# EAGLE board sdmapper (EAGLE 6.3)
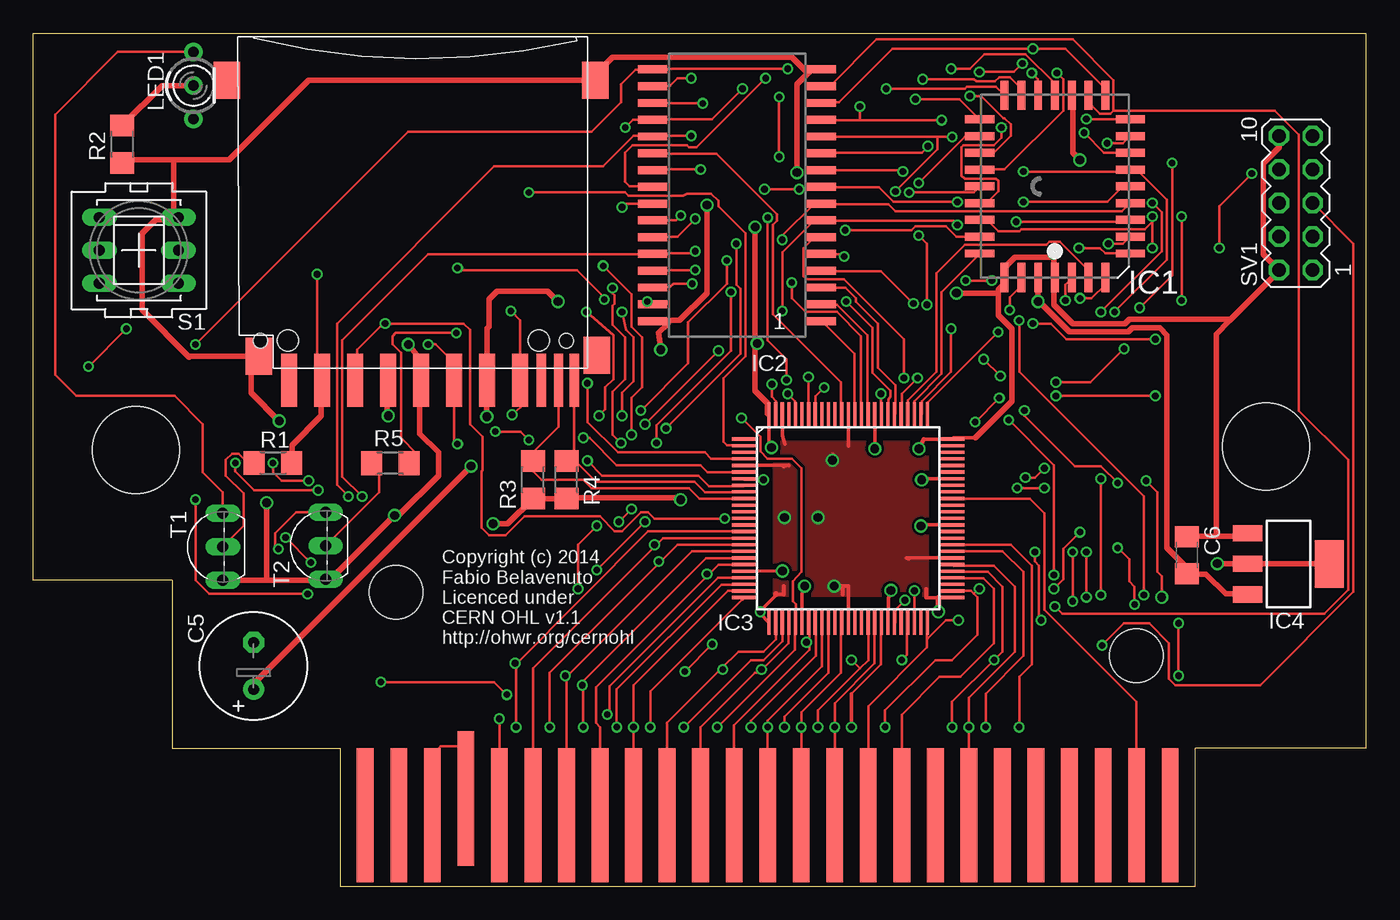
[diagram p0: board, top side]
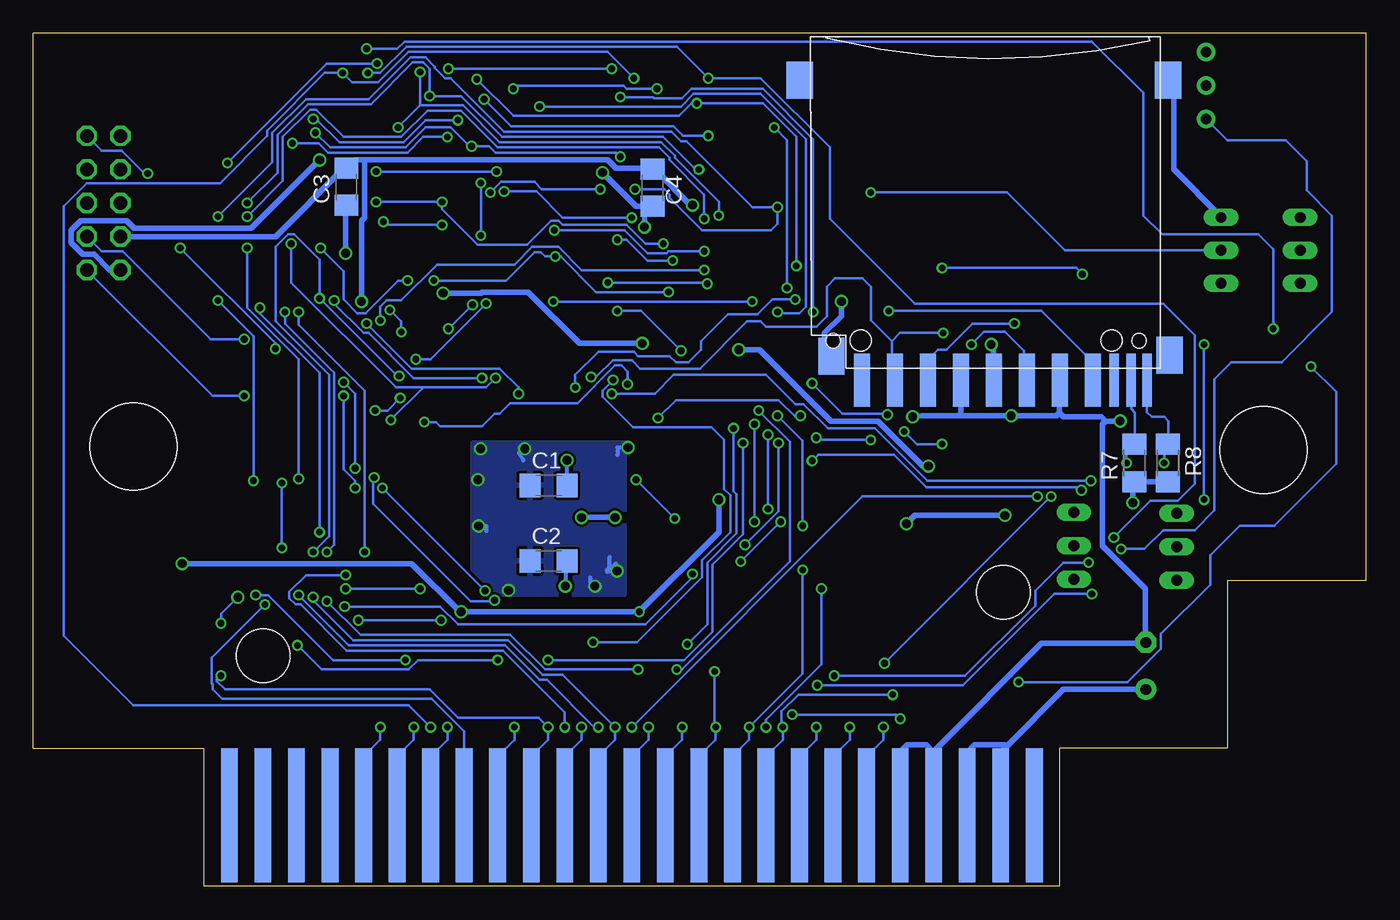
[diagram p1: board, bottom side, seen from below]

Size 101 x 64.62 mm. Coordinates in mm from the lower left corner, seen from the top.
Copper layers (1*16): Top 0.035mm / dielectric 1.5mm / Bottom 0.035mm
Design rules "ITEADstudio_DRC": minimum track width 6mil, minimum drill 12mil, track to track 6mil, track to pad 6mil, pad to pad 6mil, via to via 6mil, smd to smd 0mil, copper to edge 10mil, drill to drill 10mil, minimum pad ring 10mil, minimum via ring 6mil, stop-mask expansion 2mil, vias tented up to drill 100mil, thermal gap 10mil
Net classes: 0 default: width 0.203 mm, drill 0.508 mm, clearance 0.152 mm; 1 power: width 0.406 mm, drill 0.66 mm, clearance 0.203 mm

## Footprints (pad centres in the part's own frame; a part is rotated, then mirrored left to right if it is on the bottom)
C1206 = smd 1.6 x 1.8: 1 -1.4,0; 2 1.4,0
E3,5-8 = drill 0.813 pad 1.6: + -1.778,0 | drill 0.813 pad 1.6 octagon: - 1.778,0
PLCC32R = smd 0.6 x 2.2: 1 0,6.9; 2 -1.27,6.9; 3 -2.54,6.9; 4 -3.81,6.9; 14 -3.81,-6.9; 15 -2.54,-6.9; 16 -1.27,-6.9; 17 0,-6.9; 18 1.27,-6.9; 19 2.54,-6.9; 20 3.81,-6.9; 30 3.81,6.9; 31 2.54,6.9; 32 1.27,6.9 | smd 2.2 x 0.6: 5 -5.7,5.08; 6 -5.7,3.81; 7 -5.7,2.54; 8 -5.7,1.27; 9 -5.7,0; 10 -5.7,-1.27; 11 -5.7,-2.54; 12 -5.7,-3.81; 13 -5.7,-5.08; 21 5.7,-5.08; 22 5.7,-3.81; 23 5.7,-2.54; 24 5.7,-1.27; 25 5.7,0; 26 5.7,1.27; 27 5.7,2.54; 28 5.7,3.81; 29 5.7,5.08
SOP32 = smd 0.6 x 2.2: 1 -9.525,-5.765; 2 -8.255,-5.765; 3 -6.985,-5.765; 4 -5.715,-5.765; 5 -4.445,-5.765; 6 -3.175,-5.765; 7 -1.905,-5.765; 8 -0.635,-5.765; 9 0.635,-5.765; 10 1.905,-5.765; 11 3.175,-5.765; 12 4.445,-5.765; 13 5.715,-5.765; 14 6.985,-5.765; 15 8.255,-5.765; 16 9.525,-5.765; 17 9.525,7.035; 18 8.255,7.035; 19 6.985,7.035; 20 5.715,7.035; 21 4.445,7.035; 22 3.175,7.035; 23 1.905,7.035; 24 0.635,7.035; 25 -0.635,7.035; 26 -1.905,7.035; 27 -3.175,7.035; 28 -4.445,7.035; 29 -5.715,7.035; 30 -6.985,7.035; 31 -8.255,7.035; 32 -9.525,7.035
XC-TQ100 = smd 1.8 x 0.241: 1 -7.9,6; 2 -7.9,5.5; 3 -7.9,5; 4 -7.9,4.5; 5 -7.9,4; 6 -7.9,3.5; 7 -7.9,3; 8 -7.9,2.5; 9 -7.9,2; 10 -7.9,1.5; 11 -7.9,1; 12 -7.9,0.5; 13 -7.9,0; 14 -7.9,-0.5; 15 -7.9,-1; 16 -7.9,-1.5; 17 -7.9,-2; 18 -7.9,-2.5; 19 -7.9,-3; 20 -7.9,-3.5; 21 -7.9,-4; 22 -7.9,-4.5; 23 -7.9,-5; 24 -7.9,-5.5; 25 -7.9,-6; 51 7.9,-6; 52 7.9,-5.5; 53 7.9,-5; 54 7.9,-4.5; 55 7.9,-4; 56 7.9,-3.5; 57 7.9,-3; 58 7.9,-2.5; 59 7.9,-2; 60 7.9,-1.5; 61 7.9,-1; 62 7.9,-0.5; 63 7.9,0; 64 7.9,0.5; 65 7.9,1; 66 7.9,1.5; 67 7.9,2; 68 7.9,2.5; 69 7.9,3; 70 7.9,3.5; 71 7.9,4; 72 7.9,4.5; 73 7.9,5; 74 7.9,5.5; 75 7.9,6 | smd 0.241 x 1.8: 26 -6,-7.9; 27 -5.5,-7.9; 28 -5,-7.9; 29 -4.5,-7.9; 30 -4,-7.9; 31 -3.5,-7.9; 32 -3,-7.9; 33 -2.5,-7.9; 34 -2,-7.9; 35 -1.5,-7.9; 36 -1,-7.9; 37 -0.5,-7.9; 38 0,-7.9; 39 0.5,-7.9; 40 1,-7.9; 41 1.5,-7.9; 42 2,-7.9; 43 2.5,-7.9; 44 3,-7.9; 45 3.5,-7.9; 46 4,-7.9; 47 4.5,-7.9; 48 5,-7.9; 49 5.5,-7.9; 50 6,-7.9; 76 6,7.9; 77 5.5,7.9; 78 5,7.9; 79 4.5,7.9; 80 4,7.9; 81 3.5,7.9; 82 3,7.9; 83 2.5,7.9; 84 2,7.9; 85 1.5,7.9; 86 1,7.9; 87 0.5,7.9; 88 0,7.9; 89 -0.5,7.9; 90 -1,7.9; 91 -1.5,7.9; 92 -2,7.9; 93 -2.5,7.9; 94 -3,7.9; 95 -3.5,7.9; 96 -4,7.9; 97 -4.5,7.9; 98 -5,7.9; 99 -5.5,7.9; 100 -6,7.9
SOT223 = smd 1.219 x 2.235: 1 -2.311,-3.099; 2 0,-3.099; 3 2.311,-3.099 | smd 3.6 x 2.2: 4 0,3.099
MSXCART = smd 1.27 x 10.16 bottom: +5V1 26.67,6.35; +5V2 29.21,6.35; /CS1 85.09,6.35; /CS12 82.55,6.35; /IORQ 72.39,6.35; /M1 74.93,6.35; /RESET 67.31,6.35; /RESV2 80.01,6.35; /WAIT 77.47,6.35; /WR 69.85,6.35; A1 52.07,6.35; A3 49.53,6.35; A5 46.99,6.35; A7 59.69,6.35; A9 64.77,6.35; A11 62.23,6.35; A12 57.15,6.35; A14 54.61,6.35; D1 44.45,6.35; D3 41.91,6.35; D5 39.37,6.35; D7 36.83,6.35; GND1 31.75,6.35; GND2 34.29,6.35; SOUNDIN 24.13,6.35 | smd 1.27 x 10.16: +12V 26.67,6.35; -12V 24.13,6.35; /BUSDIR 74.93,6.35; /CS2 85.09,6.35; /INT 77.47,6.35; /MREQ 72.39,6.35; /RD 69.85,6.35; /RESV1 67.31,6.35; /RFSH 80.01,6.35; /SLTSL 82.55,6.35; A0 52.07,6.35; A2 49.53,6.35; A4 46.99,6.35; A6 59.69,6.35; A8 57.15,6.35; A10 62.23,6.35; A13 54.61,6.35; A15 64.77,6.35; CLOCK 34.29,6.35; D0 44.45,6.35; D2 41.91,6.35; D4 39.37,6.35; D6 36.83,6.35; SW1 31.75,7.62; SW2 29.21,6.35 | hole 4.064: 26.47,23.215; 82.539,18.415 | hole 6.604: 92.358,34.277; 6.751,34.007
DUOLED-C-3MM = drill 0.8 pad 1.4: 1 -2.54,0; 2 0,0; 3 2.54,0
R1206 = smd 1.6 x 1.803: 1 -1.422,0; 2 1.422,0
PVA2R = drill 0.813 long: 1 -2.997,2.489; 2 -2.997,0; 3 -2.997,-2.489; 4 2.997,2.489; 5 2.997,0; 6 2.997,-2.489
MA05-2 = drill 1.016 octagon: 1 -5.08,-1.27; 2 -5.08,1.27; 3 -2.54,-1.27; 4 -2.54,1.27; 5 0,-1.27; 6 0,1.27; 7 2.54,-1.27; 8 2.54,1.27; 9 5.08,-1.27; 10 5.08,1.27
TO92-EBC = drill 0.813 long: B 0,-1.27; C 2.54,-1.27; E -2.54,-1.27
06132 = smd 1.2 x 4: 1 6.9,0.9; 2 4.4,0.9; 3 1.9,0.9; 4 -0.6,0.9; 5 -3.1,0.9; 6 -5.6,0.9; 7 -8.1,0.9; 9 9.4,0.9 | smd 0.7 x 4: 8 -9.7,0.9; CD -11,0.9; WP -12.2,0.9 | smd 2 x 2.8: GP -13.8,-21.8; GP2 14.1,-21.8; GP3 11.7,-0.9; GP4 -13.9,-1 | hole 1.1: -11.6,-2.1 | hole 1.6: 9.5,-2.1

## Placement (x,y rotation side)
C1  100n  [C1206]  61.95,30.37 0 bottom
C2  100n  [C1206]  61.95,24.65 0 bottom
C3  100n  [C1206]  77.26,52.97 90 bottom
C4  100n  [C1206]  54.07,52.9 90 bottom
C5  220u  [E3,5-8]  16.71,16.7 90 top
C6  100n  [C1206]  87.39,25.08 270 top
IC1  AM29F010J  [PLCC32R]  77.4,53.01 180 top
IC2  HM628512ASOP32  [SOP32]  53.97,52.34 90 top
IC3  XC95144XL_TQ100  [XC-TQ100]  61.75,27.88 0 top
IC4  LM1117-3V3  [SOT223]  95.09,24.42 270 top
JP1  MSXCART1  [MSXCART]  1.03,-0.95 0 top
LED1  [DUOLED-C-3MM]  12.15,60.64 270 top
R1  4K7  [R1206]  18.18,32.07 180 top
R2  330  [R1206]  6.75,56.2 90 top
R3  4K7  [R1206]  37.87,30.8 270 top
R4  4K7  [R1206]  40.41,30.8 270 top
R5  4K7  [R1206]  27.06,32.04 0 top
R7  4K7  [R1206]  17.58,32.06 270 bottom
R8  4K7  [R1206]  15.04,32.06 270 bottom
S1  PVA2R  [PVA2R]  8.02,48.16 180 top
SV1  JTAG  [MA05-2]  95.65,51.75 90 top
T1  BC558  [TO92-EBC]  13.1,25.72 90 top
T2  BC558  [TO92-EBC]  20.89,25.8 90 top
U$1  SDMMC06132  [06132]  28.8,39.23 180 top
U$2  SDMMC06132  [06132]  28.82,39.23 180 bottom

## Library data of the parts
C1-C6 R1-R5 R7 R8 = rcl
IC1 = am29-memory
IC2 = hitachi_sram_hm628512a-series_rev1
IC3 = XC
IC4 = SparkFun-PowerIC
JP1 = msx-con
LED1 = led_duoled
S1 = switch-misc
SV1 = con-lstb; OC_FARNELL: unknown; OC_NEWARK: unknown
T1 T2 = transistor
U$1 U$2 = adafruit

## Nets
+3V3 [power]: C1.2 C2.2 IC3.5 IC3.26 IC3.38 IC3.51 IC3.57 IC3.88 IC3.98 IC4.2 IC4.4 R3.2 R4.2 R7.2 R8.2 T1.E T2.E U$1.4 U$2.4
CLOCK: IC3.22 JP1.CLOCK
CPU_A0: IC1.12 IC2.12 IC3.32 JP1.A0
CPU_A1: IC1.11 IC2.11 IC3.30 JP1.A1
CPU_A2: IC1.10 IC2.10 IC3.29 JP1.A2
CPU_A3: IC1.9 IC2.9 IC3.28 JP1.A3
CPU_A4: IC1.8 IC2.8 IC3.27 JP1.A4
CPU_A5: IC1.7 IC2.7 IC3.25 JP1.A5
CPU_A6: IC1.6 IC2.6 IC3.42 JP1.A6
CPU_A7: IC1.5 IC2.5 IC3.41 JP1.A7
CPU_A8: IC1.27 IC2.27 IC3.37 JP1.A8
CPU_A9: IC1.26 IC2.26 IC3.52 JP1.A9
CPU_A10: IC1.23 IC2.23 IC3.50 JP1.A10
CPU_A11: IC1.25 IC2.25 IC3.43 JP1.A11
CPU_A12: IC1.4 IC2.4 IC3.35 JP1.A12
CPU_A13: IC1.28 IC2.28 IC3.34 JP1.A13
CPU_A14: IC3.33 JP1.A14
CPU_A15: IC3.54 JP1.A15
CPU_D0: IC1.13 IC2.13 IC3.24 JP1.D0
CPU_D1: IC1.14 IC2.14 IC3.23 JP1.D1
CPU_D2: IC1.15 IC2.15 IC3.20 JP1.D2
CPU_D3: IC1.17 IC2.17 IC3.19 JP1.D3
CPU_D4: IC1.18 IC2.18 IC3.18 JP1.D4
CPU_D5: IC1.19 IC2.19 IC3.17 JP1.D5
CPU_D6: IC1.20 IC2.20 IC3.16 JP1.D6
CPU_D7: IC1.21 IC2.21 IC3.15 JP1.D7
CPU_IORQ: IC3.58 JP1./IORQ
CPU_M1: IC3.59 JP1./M1
CPU_MREQ: JP1./MREQ
CPU_RD: IC1.24 IC2.24 IC3.56 JP1./RD
CPU_WR: IC2.29 IC3.55 JP1./WR
DIS_MAPPER: IC3.2 S1.2
GND [power]: C1.1 C2.1 C3.1 C4.1 C5.- C6.1 IC1.1 IC1.16 IC1.30 IC2.16 IC3.21 IC3.31 IC3.44 IC3.62 IC3.69 IC3.75 IC3.84 IC3.100 IC4.1 JP1.GND1 JP1.GND2 R2.1 S1.3 SV1.2 SV1.10 U$1.3 U$1.6 U$1.GP U$1.GP3 U$2.3 U$2.6 U$2.GP U$2.GP3
N$1: JP1.SW1 JP1.SW2
N$2: LED1.1 T1.C
N$3: LED1.2 R2.2
N$4: R1.2 T1.B
N$5: R5.1 T2.B
N$8: LED1.3 T2.C
RAM_A14: IC2.3 IC3.81
RAM_A15: IC2.31 IC3.82
RAM_A16: IC2.2 IC3.85
RAM_A17: IC2.30 IC3.86
RAM_A18: IC2.1 IC3.87
RAM_CS: IC2.22 IC3.89
RESET: IC3.99 JP1./RESET
ROM_A14: IC1.29 IC3.78
ROM_A15: IC1.3 IC3.79
ROM_A16: IC1.2 IC3.80
ROM_CS: IC1.22 IC3.77
ROM_WE: IC1.31 IC3.76
SD_CD0: IC3.10 R3.1 U$1.CD
SD_CD1: IC3.96 R7.1 U$2.CD
SD_CS0: IC3.93 R1.1 U$1.1
SD_CS1: IC3.94 R5.2 U$2.1
SD_MISO: IC3.4 U$1.7 U$2.7
SD_MOSI: IC3.7 U$1.2 U$2.2
SD_SCLK: IC3.6 U$1.5 U$2.5
SD_WP0: IC3.9 R4.1 U$1.WP
SD_WP1: IC3.8 R8.1 U$2.WP
SLTSL: IC3.66 JP1./SLTSL
TCK: IC3.48 SV1.1
TDI: IC3.45 SV1.9
TDO: IC3.83 SV1.3
TMS: IC3.47 SV1.5
VCC [power]: C3.2 C4.2 C5.+ C6.2 IC1.32 IC2.32 IC4.3 JP1.+5V1 JP1.+5V2 SV1.4

## Tracks (layer width: path | path; a pad name or v marks a point on that pad's centre or on a via)
+3V3  (via drill 0.51, 0.66)
  Top 0.254: IC3.88 61.75,33.34 | IC3.98 56.75,34.13 56.95,33.49 | IC3.5 57.25,31.88 | IC3.57 66.17,24.88 | IC3.51 68.58,21.88 67.67,21.88 | IC3.38 61.75,22.75 | 56.87,22.11 56.28,22.11 56.28,22.07 55.09,20.88 v55.09,20.8 55.09,20.64 IC3.26
  Top 0.305: v60.55,32.27 60.55,32.7 | 57.25,31.88 56.85,31.81 | 66.17,24.88 66.37,24.83 | 67.67,21.88 67.67,22.54 | 61.32,22.11 61.32,22.75 v60.68,22.75 61.75,22.75 | 56.87,22.11 56.87,22.75
  Top 0.406: IC4.4 98.19,24.45 92,24.45 IC4.2 91.84,24.45 v89.7,24.45 | v68.58,20.8 68.58,21.88 | 17.7,23.18 22.07,23.18 22.15,23.26 T2.E 22.31,23.34 22.78,23.34 22.78,23.49 v27.39,28.1 27.71,28.1 30.72,31.11 30.72,32.86 29.29,34.29 29.29,38.12 U$1.4 | 17.7,23.18 T1.E | 17.7,23.18 v17.7,29.05 | v28.42,41.04 29.05,40.24 29.37,38.66 U$1.4 | R3.2 R4.2 40.56,29.45 48.98,29.45 v49.06,29.29 | 29.53,37.47 29.53,38.18 U$1.4 | 37.71,29.45 R3.2 | 56.28,22.15 56.28,22.11 | v34.85,27.46 35.95,27.46 R3.2
  Bottom 0.305: C1.2 v60.55,32.27 | C2.2 60.68,24.65 v60.68,22.75
  Bottom 0.406: v89.7,24.45 72.31,24.45 68.74,20.88 v68.58,20.8 v55.09,20.8 49.06,26.83 v49.06,29.29 | R8.2 15.08,30.64 17.55,30.64 R7.2 17.7,30.48 v17.7,29.05 | v28.42,41.04 28.26,40.88 28.26,38.34 U$2.4 | v56.91,27.94 v59.45,27.94 | v27.39,28.1 34.21,28.1 v34.85,27.46
  pour Top (rank 2): 56.24,33.54 67.67,33.54 67.67,22.11 56.24,22.11
CLOCK  (via drill 0.51)
  Top 0.203: IC3.22 51.87,23.38 43.66,15.16 43.66,13.1 v43.5,13.02 | v35.33,12.7 JP1.CLOCK
  Bottom 0.203: v43.5,13.02 35.64,13.02 v35.33,12.7
CPU_A0  (via drill 0.51)
  Top 0.203: JP1.A0 53.11,12.22 58.82,17.94 58.82,18.49 | 58.82,18.49 58.82,19.91 IC3.32 | v69.61,56.75 68.5,56.75 | 68.5,56.75 59.77,56.75 IC2.12 | v81.36,56.28 82.55,56.28 83.03,56.75 IC1.12 | 68.5,56.75 68.5,55.8 v65.33,52.63 | v55.65,50.64 55.65,41.35 57.07,39.93 v57.07,38.34 | 58.82,18.49 v58.58,18.49
  Bottom 0.203: v69.61,56.75 71.44,56.75 72.63,55.56 78.66,55.56 79.38,56.28 v81.36,56.28 | v65.33,52.63 62.87,52.63 60.88,50.64 v55.65,50.64 | v57.07,38.34 57.87,37.54 57.87,37.07 55.57,34.77 49.61,34.77 48.66,33.81 48.66,30.08 48.18,29.61 48.18,26.83 50.33,24.69 50.33,23.42 55.25,18.49 v58.58,18.49
CPU_A1  (via drill 0.51)
  Top 0.203: v51.84,12.07 57.71,17.94 57.71,19.93 IC3.30 57.71,20.08 57.79,20.32 57.79,21.35 57.55,21.59 57.55,23.1 58.19,23.81 58.19,31.67 57.47,32.39 55.65,32.39 55.09,32.94 55.09,34.05 v53.66,35.48 | v67.79,56.04 67.31,55.56 59.77,55.56 IC2.11 | v79.62,57.07 81.12,55.56 83.03,55.56 IC1.11 | v56.52,59.77 v56.52,55.25 | v41.91,43.5 43.98,41.75 43.98,38.42 43.34,37.78 43.34,36.12 v42.87,35.64
  Bottom 0.203: 53.11,9.84 51.84,11.11 v51.84,12.07 | v79.62,57.07 78.5,55.96 72.79,55.96 71.28,57.47 69.38,57.47 67.95,56.04 v67.79,56.04 66.44,56.04 65.96,55.56 56.84,55.56 v56.52,55.25 | v41.91,43.5 41.91,56.59 45.72,60.4 51.12,60.4 51.84,59.69 53.98,59.69 54.06,59.77 v56.52,59.77 | v53.66,35.48 52.31,36.83 44.53,36.83 43.26,35.56 42.95,35.56 v42.87,35.64
  Bottom 0.254: JP1.A1 53.11,9.84
CPU_A2  (via drill 0.51)
  Top 0.203: JP1.A2 50.56,12.07 54.69,16.19 55.01,16.19 55.21,16.39 | 55.21,16.39 57.23,18.42 57.23,19.96 IC3.29 | v65.88,54.13 65.81,54.21 59.77,54.21 IC2.10 | v75.01,54.13 82.95,54.13 83.03,54.21 IC1.10 83.19,54.29 83.58,54.29 85.89,51.99 85.89,47.47 v81.92,43.5 | v78.74,21.59 v78.74,25.32 | v55.17,16.43 55.21,16.39
  Bottom 0.203: v75.01,54.13 v65.88,54.13 | v81.92,43.5 81.92,42.62 78.19,38.89 78.19,25.88 v78.74,25.32 | v78.74,21.59 76.2,19.05 64.85,19.05 62.23,16.43 v55.17,16.43
CPU_A3  (via drill 0.51)
  Top 0.203: v49.3,12.07 54.38,17.15 55.33,17.15 56.76,18.57 IC3.28 | v70.01,51.83 65.17,51.83 64.06,52.94 59.77,52.94 IC2.9 | v75.01,51.83 81.36,51.83 82.47,52.94 83.03,52.94 IC1.9 | v53.26,48.66 53.26,45.56 53.58,45.24 53.58,40.32 v47.95,34.69 | v49.37,16.27 v51.44,18.34
  Bottom 0.203: 50.56,9.84 49.3,11.11 v49.3,12.07 49.37,12.14 v49.37,16.27 | v75.01,51.83 v70.01,51.83 70.01,51.28 67.31,48.58 63.58,48.58 61.76,50.4 61.2,50.4 60.88,50.09 56.04,50.09 54.61,48.66 v53.26,48.66 | v47.95,34.69 47.95,29.92 47.71,29.69 47.71,26.75 49.93,24.53 49.93,19.84 v51.44,18.34
  Bottom 0.254: JP1.A3 50.56,9.84
CPU_A4  (via drill 0.51)
  Top 0.203: JP1.A4 48.02,12.38 52.15,16.51 | 52.15,16.51 53.42,17.78 55.33,17.78 56.28,18.73 56.28,19.95 IC3.27 | IC1.8 83.03,51.67 82.47,51.12 65.33,51.12 64.77,51.67 59.77,51.67 IC2.8 59.69,51.67 59.14,51.67 56.76,49.29 v56.76,48.97 | v52.55,47.39 52.55,45.64 49.61,42.7 49.61,39.61 v46.04,36.04 | v52.23,16.43 52.15,16.51
  Bottom 0.203: v56.76,48.97 56.04,48.97 54.45,47.39 v52.55,47.39 | v46.04,36.04 43.66,33.65 43.66,24.61 51.84,16.43 v52.23,16.43
CPU_A5  (via drill 0.51)
  Top 0.203: v46.76,12.07 46.76,14.76 53.74,21.75 | 53.82,21.91 IC3.25 | v70.01,50.09 69.69,50.4 59.77,50.4 IC2.7 59.69,50.4 59.14,50.4 56.76,48.02 v56.76,43.58 | v74.46,50.32 82.95,50.32 83.03,50.4 IC1.7 | v46.36,35 v51.91,40.56 | v42.71,23.97 v46.36,27.62
  Top 0.254: 53.74,21.75 53.82,21.91
  Bottom 0.203: 48.02,9.84 46.76,11.11 v46.76,12.07 42.71,16.11 v42.71,23.97 | v70.01,50.09 74.22,50.09 v74.46,50.32 | v56.76,43.58 54.93,43.58 v51.91,40.56 | v46.36,27.62 v46.36,35
  Bottom 0.254: JP1.A5 48.02,9.84
CPU_A6  (via drill 0.51)
  Top 0.203: JP1.A6 v60.73,12.07 60.73,13.89 63.74,16.91 63.74,19.97 IC3.42 | v65.96,38.5 65.96,41.43 61.44,45.96 58.58,45.96 58.34,46.2 58.34,48.34 59.14,49.13 59.69,49.13 IC2.6 | v81.44,48.66 82.55,48.66 83.03,49.13 IC1.6 | v77.31,23.57 77.31,31.91 v73.9,35.32
  Bottom 0.203: v65.96,38.5 66.68,37.78 71.52,37.78 | 71.52,37.78 73.5,37.78 81.44,45.72 v81.44,48.66 | v60.73,12.07 60.73,13.18 65.41,17.86 77.23,17.86 80.73,21.35 81.12,21.35 81.6,21.83 81.6,22.3 80.33,23.57 v77.31,23.57 | v73.9,35.32 71.52,37.7 71.52,37.78
CPU_A7  (via drill 0.51)
  Top 0.203: v59.45,12.07 59.45,13.34 62.63,16.51 | 62.63,16.51 63.27,17.15 63.27,19.96 IC3.41 | v61.44,47.7 61.28,47.86 59.77,47.86 IC2.5 | v72.63,45.88 v70.65,45.88 | v79.22,48.34 80.81,48.34 81.2,47.94 83.03,47.94 IC1.5 | v52.87,45.01 52.87,40.56 47.23,34.93 v47.23,33.58 | 62.63,16.51 v61.99,17.15
  Bottom 0.203: 60.73,9.84 59.45,11.11 v59.45,12.07 | v70.65,45.88 65.17,45.88 63.03,48.02 62.55,48.02 62.23,47.7 v61.44,47.7 61.04,47.7 58.34,45.01 v52.87,45.01 | v72.63,45.88 73.35,45.88 75.81,43.42 76.44,43.42 77.47,44.45 77.47,46.59 v79.22,48.34 | v47.23,33.58 47.23,26.67 49.53,24.37 49.53,19.29 51.68,17.15 v61.99,17.15
  Bottom 0.254: JP1.A7 60.73,9.84
CPU_A8  (via drill 0.51)
  Top 0.203: JP1.A8 v58.19,12.07 58.19,13.18 61.2,16.19 61.2,19.93 IC3.37 | v50.17,50.56 48.82,49.21 48.26,49.21 IC2.27 | 84.78,50.32 v84.78,50.72 | 84.78,50.32 84.22,49.77 74.85,49.77 74.7,49.61 73.11,49.61 72.31,50.4 71.76,50.4 IC1.27 | v80.89,30.88 v80.89,22.07 | 84.78,50.32 v84.78,48.34
  Bottom 0.203: v50.17,50.56 50.17,52.39 52.79,55.01 52.79,55.17 53.58,55.96 65.81,55.96 68.58,58.74 71.12,58.74 73.11,56.75 77.47,56.75 79.54,58.82 80.01,58.82 82.08,56.75 82.08,53.42 v84.78,50.72 | v58.19,12.07 58.5,12.07 62.07,15.64 62.63,15.64 65.25,18.26 77.08,18.26 v80.89,22.07 | v80.89,30.88 80.89,39.93 84.78,43.82 v84.78,48.34
CPU_A9  (via drill 0.51)
  Top 0.203: v64.53,12.07 64.53,13.34 68.34,17.15 69.61,17.15 71.52,19.05 71.52,21.91 71.28,22.15 | 71.28,22.15 71.04,22.38 IC3.52 | v73.35,57.47 73.35,56.67 72.79,56.12 70.49,56.12 70.33,55.96 70.33,53.82 70.57,53.58 72.95,53.58 73.11,53.42 73.11,52.63 72.23,51.75 71.76,51.75 IC1.26 | v71.68,61.67 74.3,61.67 v74.93,62.31 | v86.28,54.77 86.28,46.28 v83.82,43.82 | v79.3,26.83 78.03,25.56 78.03,23.26 v77.31,22.54 | 71.28,22.15 v71.68,22.54 | IC2.26 48.69,50.43 v49.06,50.8
  Bottom 0.203: 65.81,9.84 64.53,11.11 v64.53,12.07 | v49.06,50.8 49.06,51.83 52.39,55.17 52.39,55.32 53.42,56.36 65.65,56.36 68.42,59.13 71.68,59.13 | v73.35,57.47 71.68,59.13 | v71.68,61.67 71.68,59.13 | v74.93,62.31 78.74,62.31 v86.28,54.77 | v83.82,43.82 83.82,43.42 79.3,38.89 v79.3,26.83 | v71.68,22.54 v77.31,22.54
  Bottom 0.254: JP1.A9 65.81,9.84
CPU_A10  (via drill 0.51)
  Top 0.203: JP1.A10 63.27,13.65 67.71,18.1 67.71,18.81 | 67.71,18.81 67.71,19.93 IC3.50 | v50.56,54.29 48.26,54.29 IC2.23 | v70.96,59.85 71.84,59.85 73.5,58.18 73.58,58.18 74.06,57.71 74.06,56.83 72.79,55.56 71.76,55.56 IC1.23 | v84.78,51.75 85.49,51.04 85.49,48.1 v80.89,43.5 | v75.89,25.32 75.89,24.61 76.2,24.29 76.2,20.32 v76.36,20.16 | v70.09,20.16 69.14,20.16 67.79,18.81 67.71,18.81
  Bottom 0.203: v50.56,54.29 50.8,54.29 53.26,56.75 65.49,56.75 68.58,59.85 v70.96,59.85 70.96,61.91 71.44,62.39 72.23,62.39 75.41,59.21 80.17,59.21 82.47,56.91 82.47,54.05 v84.78,51.75 | v80.89,43.5 80.89,42.54 75.89,37.54 v75.89,25.32 | v70.09,20.16 v76.36,20.16
CPU_A11  (via drill 0.51, 0.66)
  Top 0.203: v58.03,52.78 v55.41,52.78 | v66.36,52.55 71.28,52.55 71.68,52.94 IC1.25 | v87,44.37 v87,50.72 | 61.99,14.6 64.22,16.83 64.22,19.94 IC3.43 | v86.76,19.92 v86.76,15.95 | v85.49,21.91 85.49,23.49 85.17,23.81 85.17,29.84 v84.3,30.72 | IC2.25 44.88,51.7 v44.61,51.43
  Top 0.254: v61.99,12.07 61.99,14.6
  Bottom 0.203: 63.27,9.84 61.99,11.11 v61.99,12.07 62.71,12.78 68.82,12.78 70.96,14.92 86.44,14.92 87.08,15.56 87.08,15.64 v86.76,15.95 | v55.41,52.78 53.18,52.78 52.79,52.39 52.79,52.15 50.33,49.69 45.09,49.69 44.61,50.16 v44.61,51.43 46.52,51.43 51.52,56.44 51.91,56.44 52.63,57.15 65.33,57.15 69.38,61.2 69.77,61.2 70.57,61.99 70.57,62.07 71.28,62.79 72.39,62.79 75.57,59.61 80.33,59.61 82.87,57.07 82.87,54.85 v87,50.72 | v58.03,52.78 62.47,52.78 63.03,53.34 65.57,53.34 v66.36,52.55 | v87,44.37 84.3,41.67 v84.3,30.72 | v86.76,19.92 86.76,20.64 v85.49,21.91
  Bottom 0.254: JP1.A11 63.27,9.84
CPU_A12  (via drill 0.51)
  Top 0.203: v56.91,12.07 56.91,12.86 60.25,16.19 IC3.35 | v66.68,44.13 64.22,46.59 59.77,46.59 IC2.4 | v73.27,38.66 v72,39.93 | v79.3,44.53 80.17,44.53 81.2,45.56 81.2,46.04 IC1.4 | v79.78,21.91 v79.78,25.32
  Top 0.254: IC3.35
  Bottom 0.203: 58.19,9.84 56.91,11.11 v56.91,12.07 60.88,16.03 62.39,16.03 65.01,18.65 76.76,18.65 79.78,21.67 v79.78,21.91 | v66.68,44.13 70.89,39.93 v72,39.93 | v73.27,38.66 73.42,38.66 v79.3,44.53 79.3,47.47 81.2,49.37 81.68,49.37 82.63,48.42 82.63,42.78 78.58,38.73 78.58,26.51 v79.78,25.32
  Bottom 0.254: JP1.A12 58.19,9.84
CPU_A13  (via drill 0.51)
  Top 0.203: JP1.A13 v55.65,12.07 55.65,12.54 59.77,16.67 59.77,19.95 IC3.34 | v50.17,48.1 50.01,47.94 48.26,47.94 IC2.28 48.1,47.86 29.93,47.86 23.42,41.35 23.42,31.04 v24.93,29.53 | v61.52,49.69 66.52,49.69 66.84,50.01 69.14,50.01 69.93,49.21 71.68,49.21 IC1.28
  Bottom 0.203: v50.17,48.1 52.87,48.1 53.03,47.94 54.45,47.94 56.2,49.69 v61.52,49.69 | v24.93,29.53 38.18,29.53 v55.65,12.07
CPU_A14  (via drill 0.51)
  Top 0.203: v54.38,12.07 54.38,12.54 59.3,17.46 59.3,19.93 IC3.33
  Bottom 0.203: 55.65,9.84 54.38,11.11 v54.38,12.07
  Bottom 0.254: JP1.A14 55.65,9.84
CPU_A15
  Top 0.203: JP1.A15 65.81,13.02 68.66,15.87 70.25,15.87 72.79,18.42 72.79,22.54 72,23.34 69.69,23.34 IC3.54
CPU_D0  (via drill 0.51)
  Top 0.203: JP1.D0 v45.48,12.07 45.48,15.24 52.63,22.38 53.84,22.38 IC3.24 | v68.82,58.02 62.63,58.02 | 62.63,58.02 59.77,58.02 IC2.13 | v79.78,58.1 83.03,58.1 IC1.13 | v62.63,59.05 62.63,58.02 | v44.61,35.64 44.61,37.39 45.48,38.26 45.48,41.59 44.93,42.15 v44.61,43.5 | v42.71,27.31 41.28,25.88 v41.28,22.54
  Bottom 0.203: v68.82,58.02 71.28,58.02 72.95,56.36 77.79,56.36 79.54,58.1 v79.78,58.1 | v62.63,59.05 51.91,59.05 50.96,60.01 45.88,60.01 42.47,56.59 42.47,43.89 42.95,43.42 44.53,43.42 v44.61,43.5 | v44.61,35.64 42.71,33.73 v42.71,27.31 | v41.28,22.54 41.28,16.83 45.48,12.62 v45.48,12.07
CPU_D1  (via drill 0.51)
  Top 0.203: v44.22,12.07 44.22,14.92 52.15,22.86 53.84,22.86 IC3.23 | IC2.14 59.77,59.37 61.04,59.37 65.09,63.42 v75.73,63.42 78.19,63.42 81.2,60.4 81.2,59.93 IC1.14 | v26.36,15.48 34.93,15.48 v35.88,14.53 | v4.21,39.37 v7.07,42.23
  Bottom 0.203: 45.48,9.84 44.22,11.11 v44.22,12.07 44.29,12.14 44.29,13.26 43.02,14.53 v35.88,14.53 | v75.73,63.42 73.42,63.42 72.87,63.98 20.8,63.98 16.91,60.09 16.91,50.8 15.48,49.37 8.18,49.37 7.07,48.26 v7.07,42.23 | v26.36,15.48 18.1,15.48 15.56,18.02 15.56,19.13 11.83,22.86 11.83,25.08 9.61,27.31 6.99,27.31 2.3,31.99 2.3,37.47 v4.21,39.37
  Bottom 0.254: JP1.D1 45.48,9.84
CPU_D2  (via drill 0.51)
  Top 0.203: JP1.D2 42.95,12.07 42.63,12.38 42.63,15.08 51.12,23.57 | 51.12,23.57 51.91,24.37 53.84,24.37 IC3.20 | 81.84,58.74 81.6,58.5 80.81,58.5 80.01,59.29 80.01,59.85 IC1.15 | 81.84,58.74 81.84,61.04 78.74,64.14 63.9,64.14 60.41,60.64 59.77,60.64 IC2.15 | 81.84,58.74 94.06,58.74 95.89,56.91 95.89,36.04 99.62,32.31 99.62,22.46 97.79,20.64 77.95,20.64 v77.39,21.19 | v51.04,23.65 51.12,23.57
  Bottom 0.203: v77.39,21.19 70.17,21.19 68.82,19.84 54.61,19.84 51.04,23.42 v51.04,23.65
CPU_D3  (via drill 0.51)
  Top 0.203: v41.67,12.07 41.67,15.24 | 41.67,15.24 41.67,15.56 50.96,24.84 53.72,24.84 IC3.19 | v57.15,61.91 48.26,61.91 IC2.17 48.1,61.83 45.64,61.83 44.53,60.72 44.53,59.37 42.31,57.15 28.42,57.15 v12.31,41.04 | v69.54,61.91 70.96,61.91 72.08,63.02 75.17,63.02 77.39,60.8 77.39,59.93 IC1.17 | v12.31,29.29 12.31,23.18 13.34,22.15 v20.8,22.15 | v41.6,15.24 41.67,15.24
  Bottom 0.203: 42.95,9.84 41.67,11.11 v41.67,12.07 | v69.54,61.91 v57.15,61.91 | v12.31,29.29 v12.31,41.04 | v20.8,22.15 23.66,22.15 30.56,15.24 v41.6,15.24
  Bottom 0.254: JP1.D3 42.95,9.84
CPU_D4  (via drill 0.51)
  Top 0.203: JP1.D4 40.41,15.87 | 40.41,15.87 49.93,25.4 53.83,25.4 IC3.18 | v75.65,61.6 76.12,61.12 76.12,59.93 IC1.18 | v49.85,61.2 48.82,61.2 48.26,60.64 IC2.18 | v21.04,24.53 v19.13,26.43 | v40.33,15.95 40.41,15.87
  Bottom 0.203: v75.65,61.6 74.7,61.6 72.71,63.58 52.23,63.58 v49.85,61.2 45.88,61.2 40.64,55.96 40.64,50.56 34.21,44.13 15.4,44.13 13.02,41.75 13.02,30.48 14.29,29.21 16.35,29.21 v19.13,26.43 | v21.04,24.53 22.94,24.53 25.09,22.38 25.09,21.27 30.4,15.95 v40.33,15.95
CPU_D5  (via drill 0.51)
  Top 0.203: v39.13,12.07 39.13,16.19 47.47,24.53 | 47.47,24.53 48.82,25.88 IC3.17 | v50.72,59.29 48.26,59.29 IC2.19 | v67.39,61.12 71.28,61.12 71.44,60.96 72.87,60.96 73.19,61.28 73.98,61.28 74.85,60.4 74.85,59.93 IC1.19 | v43.18,46.99 45.33,44.85 45.33,42.39 46.12,41.59 46.12,37.78 45.33,36.99 v45.33,34.21 | v44.37,27.62 v45.33,28.58 | v47.39,24.61 47.47,24.53
  Bottom 0.203: 40.41,9.84 39.13,11.11 v39.13,12.07 | v67.39,61.12 64.61,58.34 52.07,58.34 51.12,59.29 v50.72,59.29 45.72,59.29 43.18,56.75 v43.18,46.99 | v45.33,28.58 v45.33,34.21 | v47.39,24.61 v44.37,27.62
  Bottom 0.254: JP1.D5 40.41,9.84
CPU_D6  (via drill 0.51)
  Top 0.203: JP1.D6 37.87,16.51 47.15,25.8 | 47.15,25.8 47.71,26.35 53.83,26.35 IC3.16 | v53.74,60.4 51.44,58.1 48.26,58.1 IC2.20 45.43,58.05 v44.85,57.47 | v64.61,60.4 70.57,60.4 70.73,60.56 72.95,60.56 73.58,59.93 IC1.20 | v43.9,45.32 43.9,44.93 44.06,44.77 44.06,44.13 43.9,43.97 43.9,42.54 44.85,41.59 44.85,38.42 43.9,37.47 43.9,34.21 v44.53,33.58 | v47.07,25.88 47.15,25.8
  Bottom 0.203: v64.61,60.4 64.53,60.64 56.28,60.64 56.04,60.4 v53.74,60.4 | v44.85,57.47 43.9,56.51 v43.9,45.32 | v44.53,33.58 44.53,28.42 v47.07,25.88
CPU_D7  (via drill 0.51)
  Top 0.203: v36.59,12.07 36.59,16.83 | 36.59,16.83 46.6,26.91 53.8,26.91 IC3.15 | v66.84,59.61 70.17,59.61 71.68,58.1 IC1.21 | v23.89,29.53 23.02,30.4 23.02,42.62 34.93,54.53 43.18,54.53 45.48,56.83 46.88,56.83 IC2.21 46.98,56.83 v49.85,56.83 | v36.52,16.91 36.59,16.83
  Bottom 0.203: 37.87,9.84 36.59,11.11 v36.59,12.07 | v49.85,56.83 51.76,56.83 52.47,57.55 64.77,57.55 v66.84,59.61 | v36.52,16.91 v23.89,29.53
  Bottom 0.254: JP1.D7 37.87,9.84
CPU_IORQ  (via drill 0.51)
  Top 0.203: v72.16,12.07 72.16,14.6 75.01,17.46 75.01,23.81 73.42,25.4 69.67,25.4 IC3.58
  Bottom 0.203: 73.42,9.84 72.16,11.11 v72.16,12.07
  Bottom 0.254: JP1./IORQ 73.42,9.84
CPU_M1  (via drill 0.51)
  Top 0.203: v74.7,12.07 74.7,15.87 75.65,16.83 75.65,24.29 74.06,25.88 IC3.59
  Bottom 0.203: 75.97,9.84 74.7,11.11 v74.7,12.07
  Bottom 0.254: JP1./M1 75.97,9.84
CPU_RD  (via drill 0.51)
  Top 0.203: JP1./RD v70.89,12.07 70.89,14.29 74.38,17.78 74.38,22.7 72.79,24.29 69.74,24.29 IC3.56 | v55.49,61.2 50.25,55.96 49.69,55.96 49.53,56.12 45.41,56.12 44.85,55.56 44.85,53.34 45.17,53.02 46.88,53.02 IC2.24 | v77.55,61.6 78.03,61.12 78.03,58.74 73.58,54.29 71.76,54.29 IC1.24
  Bottom 0.203: v55.49,61.2 57.47,63.18 72.55,63.18 74.85,60.88 76.84,60.88 v77.55,61.6 78.9,61.6 83.27,57.23 83.27,56.83 86.84,53.26 96.92,53.26 98.67,51.51 98.67,18.97 93.43,13.73 72.55,13.73 v70.89,12.07
CPU_WR  (via drill 0.51)
  Top 0.203: v69.61,12.07 69.61,13.97 v72.79,17.15 73.42,17.78 73.42,22.7 72.31,23.81 69.71,23.81 IC3.55 | v50.17,46.67 48.26,46.67 IC2.29 | v74.7,42.86 74.7,38.97 84.14,29.53 v84.14,22.07
  Bottom 0.203: 70.89,9.84 69.61,11.11 v69.61,12.07 | v50.17,46.67 59.45,46.67 61.2,48.42 63.19,48.42 64.53,47.07 70.41,47.07 73.11,44.37 74.22,44.37 74.7,43.89 v74.7,42.86 | v72.79,17.15 78.27,17.15 83.19,22.07 v84.14,22.07
  Bottom 0.254: JP1./WR 70.89,9.84
DIS_MAPPER  (via drill 0.51)
  Top 0.203: v37.55,52.55 44.85,52.55 45.09,52.31 49.22,52.31 49.53,52.47 51.36,52.47 51.91,51.91 51.91,51.51 53.98,49.45 53.98,40.16 52.31,38.5 52.31,33.65 52.55,33.42 53.82,33.42 53.82,33.41 IC3.2
  Bottom 0.203: v37.55,52.55 27.23,52.55 22.86,48.18 11.04,48.18 S1.2
GND  (via drill 0.66)
  Top 0.254: IC3.44 64.77,21.83 v64.97,22.42 | IC3.21 v56.77,23.89 | IC3.31 58.25,22.18 v58.45,22.75 | IC3.84 63.76,34.08 v63.76,33.15 | 67.45,33.88 IC3.75 69.69,33.97 71.36,33.97 | IC3.69 67.21,30.88 | IC3.62 67.26,27.38 | v55.93,33.24 55.73,33.48 55.75,34.23 IC3.100 55.65,35.8
  Top 0.305: 67.45,33.88 v67.09,33.15 | 67.21,30.88 v67.31,30.8 | 67.26,27.38 v67.26,27.29
  Top 0.406: 71.36,33.97 74.14,36.75 74.14,42.23 73.11,43.26 73.11,44.93 | 73.11,44.93 73.11,45.16 73.5,45.56 73.5,45.96 IC1.30 73.66,46.12 73.66,46.91 74.38,47.62 77.16,47.62 v77.31,47.94 77.31,46.2 IC1.1 77.31,45.96 77.31,44.05 78.74,42.62 82.71,42.62 83.03,42.94 90.49,42.94 90.61,42.82 | 89.62,26.51 91.76,26.51 91.92,26.67 IC4.1 | 89.62,26.51 87.39,26.51 C6.1 | v79.3,55.01 78.74,55.56 78.74,59.85 IC1.16 | SV1.10 94.38,55.96 93.19,54.77 93.19,47.86 SV1.2 94.3,46.51 90.61,42.82 | 89.62,26.51 89.62,41.83 90.61,42.82 | v57.87,54.05 57.87,60.72 58.7,61.56 | 58.7,61.56 58.98,61.83 59.69,61.83 IC2.16 | 55.65,35.8 55.65,36.59 54.69,37.54 54.69,41.12 | v54.69,49.93 54.69,41.12 | 58.7,61.56 57.47,62.79 43.9,62.79 42.15,61.04 41.99,61.04 U$1.GP 41.75,61.04 20.88,61.04 14.85,55.01 10.66,55.01 | v34.37,35.56 34.37,36.35 U$1.6 34.4,42.25 34.53,42.39 34.53,44.45 35.17,45.08 38.98,45.08 v39.77,44.29 | U$1.3 26.83,36.35 26.83,35.72 v26.91,35.64 | v18.66,35.24 16.51,37.39 16.51,39.93 U$1.GP3 16.43,40.16 11.99,40.16 11.83,40.08 8.26,43.66 8.26,49.45 9.29,50.48 10.85,50.48 S1.3 10.66,51.01 10.66,55.01 | 10.66,55.01 6.98,55.01 R2.1 | v69.93,44.93 73.11,44.93 | v54.85,41.12 54.69,41.12
  Bottom 0.305: 56.85,24.46 57.51,23.83 57.51,24.02 | v58.45,22.75 58.78,22.75 58.78,23.38 | v64.97,22.42 65.13,22.42 65.13,22.75 | v56.77,23.89 57.33,23.84 57.33,24.93 | v63.76,33.15 64.21,32.81 63.86,32.27 | v67.09,33.15 67.03,33.46 67.03,32.91 | v67.31,30.8 67.03,30.8 67.03,31 | v67.26,27.29 66.67,27.29 66.67,26.91 | v55.93,33.24 56.74,33.24 56.74,32.65
  Bottom 0.406: v77.31,47.94 77.31,51.51 C3.1 | v79.3,55.01 84.46,49.85 93.35,49.85 93.9,50.4 97.4,50.4 98.11,49.69 98.11,48.74 97.24,47.86 96.36,47.86 95.17,46.67 SV1.2 | v57.87,54.05 55.33,51.51 54.14,51.51 C4.1 54.69,51.36 v54.69,49.93 | 14.69,60.96 U$2.GP 14.61,60.8 14.61,54.29 11.04,50.72 S1.3 | JP1.GND2 35.33,10.16 34.77,10.72 33.34,10.72 32.79,10.16 JP1.GND1 32.71,10.32 24.61,18.42 16.91,18.42 C5.- 16.75,18.49 16.75,22.54 20.01,25.8 20.01,35 19.77,35.24 | 39.85,40.08 U$2.GP3 | v34.37,35.56 33.66,35.64 30.88,35.64 | 30.88,35.64 v26.91,35.64 23.5,35.64 23.26,35.88 | v69.93,44.93 67.08,44.93 67,45.01 63.5,45.01 59.61,41.12 v54.85,41.12 | 39.77,40.25 U$2.GP3 | v39.77,44.29 39.77,43.18 41.04,41.91 41.04,40.17 U$2.GP3 | U$2.3 30.73,35.79 30.88,35.64 | 23.26,35.88 23.26,38.3 U$2.6 | v18.66,35.24 19.77,35.24 | 23.26,35.88 22.94,35.56 20.09,35.56 19.77,35.24
  pour Bottom (rank 2): 56.24,33.54 67.67,33.54 67.67,22.11 56.24,22.11
N$1
  Top 0.203: JP1.SW2 30.25,10 30.88,10.64 32.15,10.64 32.79,10 JP1.SW1
N$2
  Top 0.203: T1.C 14.37,29.84 12.86,31.35 12.86,35 10.72,37.15 3.26,37.15 1.67,38.73 1.67,58.42 6.43,63.18 LED1.1
N$3
  Top 0.406: LED1.2 9.77,60.64 R2.2
N$4
  Top 0.203: R1.2 16.28,32.07 15.56,32.78 15.08,32.78 14.61,32.31 14.61,31.11 15.96,29.77 15.96,27.31 T1.B
N$5
  Top 0.203: R5.1 26.2,31.99 26.2,29.84 22.23,25.88 T2.B
N$8  (via drill 0.51)
  Top 0.203: v18.58,25.56 18.34,25.8 18.34,26.75 19.93,28.34 22.15,28.34 T2.C
  Bottom 0.203: v18.58,25.56 16.83,25.56 15.4,26.99 13.02,26.99 11.51,28.5 11.51,38.42 10.24,39.69 6.43,39.69 2.62,43.5 2.62,50.8 4.53,52.71 4.53,54.93 6.11,56.51 10.56,56.51 LED1.3
RAM_A14
  Top 0.203: IC3.81 65.33,35.8 65.33,37.94 63.98,39.29 63.98,42.62 62.31,44.29 62.31,44.53 61.52,45.32 59.77,45.32 IC2.3
RAM_A15  (via drill 0.51)
  Top 0.203: v61.6,44.29 63.58,42.31 63.58,38.89 64.93,37.54 64.93,37.07 64.77,36.91 64.77,35.8 IC3.82 | v46.52,44.29 48.02,44.29 48.18,44.13 IC2.31
  Bottom 0.203: v46.52,44.29 v61.6,44.29
RAM_A16
  Top 0.203: IC3.85 63.19,35.8 63.19,41.75 60.88,44.05 59.77,44.05 IC2.2
RAM_A17  (via drill 0.51)
  Top 0.203: v57.47,45.72 57.47,44.53 58.5,43.5 60.88,43.5 62.71,41.67 62.71,35.8 IC3.86 | v49.93,45.64 48.5,45.64 48.26,45.4 IC2.30
  Bottom 0.203: v57.47,45.72 50.01,45.72 v49.93,45.64
RAM_A18
  Top 0.203: IC3.87 62.23,35.8 62.23,40.32 59.77,42.78 IC2.1
RAM_CS
  Top 0.203: IC3.89 61.2,35.8 61.2,38.18 56.04,43.34 56.04,50.09 56.36,50.4 56.36,50.88 51.76,55.48 48.26,55.48 IC2.22
RESET  (via drill 0.51)
  Top 0.203: v83.43,21.35 83.43,22.7 83.03,23.1 83.03,24.77 v82.16,25.64 | v82.16,30.56 80.89,31.83 78.9,31.83 75.09,35.64 v75.09,36.04 | v71.36,35.16 v73.19,36.99 | v55.96,38.02 55.96,37.07 56.28,36.75 56.28,35.88 IC3.99
  Top 0.254: 56.28,35.8 IC3.99
  Bottom 0.203: JP1./RESET 68.34,11.75 70.81,14.21 86.68,14.21 87.39,14.92 87.39,15.32 87.47,15.4 87.47,17.3 v83.43,21.35 | v82.16,30.56 v82.16,25.64 | v75.09,36.04 74.14,36.04 v73.19,36.99 | v71.36,35.16 70.49,35.16 70.17,34.85 67,34.85 66.04,35.8 65.65,35.8 64.85,36.59 59.77,36.59 56.91,39.45 56.44,39.45 55.96,38.97 v55.96,38.02
ROM_A14
  Top 0.203: IC3.78 66.76,35.8 66.76,36.75 68.82,38.81 68.82,45.01 71.68,47.86 IC1.29
ROM_A15
  Top 0.203: IC3.79 66.28,35.8 66.28,36.83 68.42,38.97 68.42,46.43 70.57,48.58 76.76,48.58 77,48.82 77.79,48.82 79.93,46.67 IC1.3
ROM_A16  (via drill 0.51)
  Top 0.203: v67,38.5 65.81,37.31 65.81,35.8 IC3.80 | v78.19,44.37 78.19,45.56 78.66,46.04 IC1.2
  Bottom 0.203: v67,38.5 72.16,38.5 75.57,41.91 75.97,41.91 78.19,44.13 v78.19,44.37
ROM_CS  (via drill 0.51)
  Top 0.203: v69.54,42.23 69.54,38.97 67.31,36.75 67.31,35.8 IC3.77 | v67.71,44.05 67.71,48.66 v67.08,49.29 | v67.08,53.26 70.57,56.75 71.68,56.75 IC1.22
  Bottom 0.203: v67.71,44.05 v69.54,42.23 | v67.08,53.26 v67.08,49.29
ROM_WE  (via drill 0.51)
  Top 0.203: v73.11,41.99 67.79,36.67 67.79,35.8 IC3.76 | v73.98,43.66 73.98,44.61 74.85,45.48 74.85,46.04 IC1.31
  Bottom 0.203: v73.11,41.99 73.11,42.78 v73.98,43.66
SD_CD0
  Top 0.203: U$1.CD 39.8,34.79 37.87,32.86 | R3.1 37.87,31.43 38.5,30.8 41.67,30.8 42.31,30.16 49.69,30.16 50.49,29.37 IC3.10
  Top 0.254: 37.87,32.86 R3.1
SD_CD1  (via drill 0.51)
  Top 0.203: v57.15,37.31 57.71,36.75 57.71,35.8 IC3.96 | v20.88,30.72 18.82,30.72 18.18,31.35 v18.18,32.07
  Bottom 0.203: v57.15,37.31 53.9,37.31 52.47,38.73 45.48,38.73 43.26,36.51 42.63,36.51 40.8,34.69 37.23,34.69 33.26,30.72 v20.88,30.72 | v18.18,32.07 18.18,32.86 17.62,33.42 R7.1 17.55,33.52 17.55,35.88 17.82,36.16 U$2.CD
SD_CS0  (via drill 0.51)
  Top 0.203: IC3.93 59.25,37.1 v59.93,37.78 | v43.26,44.45 43.26,44.61 41.2,46.67 32.31,46.67 v32.15,46.83 | v21.51,46.36 21.51,38.1 21.83,37.47
  Top 0.406: R1.1 19.61,33.42 21.83,35.64 21.83,37.47 21.83,37.94 U$1.1
  Bottom 0.203: v59.93,37.78 59.93,38.73 58.19,40.48 55.49,40.48 55.17,40.16 52.79,40.16 52.31,39.69 51.36,39.69 50.41,40.64 50.41,41.28 48.34,43.34 46.12,43.34 45.01,44.45 v43.26,44.45 | v32.15,46.83 21.99,46.83 v21.51,46.36
SD_CS1  (via drill 0.51)
  Top 0.203: v58.74,38.58 58.74,35.8 IC3.94 | v32.07,41.91 27.47,41.91 27.23,41.67 27.23,41.04 27.86,40.4 27.86,33.97 29.05,32.78 29.05,32.07 R5.2
  Bottom 0.203: v58.74,38.58 58.34,38.58 57.07,39.85 55.65,39.85 55.01,39.21 50.49,39.21 46.91,42.78 45.88,42.78 45.48,42.39 41.67,42.39 40.88,43.18 40.88,45.4 40.25,46.04 38.18,46.04 37.55,45.4 37.55,42.86 35.96,41.28 | 35.96,41.28 35.96,38.57 U$2.1 | v32.07,41.91 35.33,41.91 35.96,41.28
SD_MISO  (via drill 0.51)
  Top 0.203: v41.99,38.1 41.99,35.16 44.29,32.86 50.88,32.86 51.37,32.38 IC3.4 | v36.28,35.72 36.91,36.27 U$1.7 36.9,42.88 v36.2,43.58
  Bottom 0.203: 20.48,39.45 24.61,43.58 v36.2,43.58 | v36.28,35.72 36.36,35.8 39.69,35.8 v41.99,38.1
  Bottom 0.406: 20.48,39.45 20.8,38.66 U$2.7
SD_MOSI  (via drill 0.51)
  Top 0.203: v55.33,30.8 53.9,30.8 IC3.7 | v52.39,27.86 47.07,27.86 46.6,28.34 46.04,28.34 44.61,26.91 44.06,26.91 42.95,28.02 37.23,28.02 35.8,26.59 34.53,26.59 33.98,27.15 33.98,31.43 34.05,31.51 34.05,34.05 33.1,35 33.1,42.15 32.63,42.62 v26.67,42.62 26.51,42.62 24.53,40.64 24.53,38.46 U$1.2
  Bottom 0.203: v26.67,42.62 29.85,42.62 31.83,40.64 32.47,40.64 33.1,40.01 33.1,38.45 U$2.2 | v52.39,27.86 v55.33,30.8
SD_SCLK  (via drill 0.51)
  Top 0.203: v32.15,33.5 31.9,33.75 U$1.5 32.15,38.58 32.15,39.37 30.48,41.04 v29.93,41.04 | v35.01,34.45 36.91,34.45 v37.55,33.81 | v41.67,33.97 42.15,33.97 44.22,31.91 50.56,31.91 51.1,31.38 IC3.6
  Bottom 0.203: v32.15,33.5 34.05,33.5 v35.01,34.45 | v37.55,33.81 41.52,33.81 v41.67,33.97 | U$2.5 25.96,38.56 25.96,40.56 27.39,41.99 28.98,41.99 v29.93,41.04
SD_WP0
  Top 0.203: U$1.WP 41,32.9 | 40.56,32.38 40.89,32.38 42.63,30.64 50.09,30.64 50.88,29.84 53.82,29.84 IC3.9
  Top 0.254: 41,32.9 R4.1 40.56,32.38
SD_WP1  (via drill 0.51)
  Top 0.203: v21.59,30 16.75,30 15.32,31.43 v15.32,32.07 | v41.99,32.23 43.1,31.11 50.41,31.11 51.2,30.32 53.8,30.32 IC3.8
  Bottom 0.203: v21.59,30 21.83,30.24 33.34,30.24 35.8,32.7 41.52,32.7 v41.99,32.23 | v15.32,32.07 15.32,33.18 15.08,33.42 R8.1 15.01,33.51 15.01,35.24 15.32,35.56 16.28,35.56 16.62,35.91 U$2.WP
SLTSL
  Top 0.203: JP1./SLTSL 83.58,13.97 76.6,20.95 76.6,28.26 75.49,29.37 IC3.66
  Top 0.254: IC3.66
TCK  (via drill 0.51)
  Top 0.203: v66.76,22.38 66.76,20 IC3.48 | v76.6,30.16 v74.54,30.16 | v85.01,37.15 v77.47,37.15
  Bottom 0.203: v74.54,30.16 v66.76,22.38 | v76.6,30.16 76.6,30.72 77.47,31.59 v77.47,37.15 | v85.01,37.15 87.39,37.15 SV1.1
TDI  (via drill 0.51)
  Top 0.203: v66.04,21.67 65.33,20.95 65.33,20 IC3.45 | v75.17,30.96 75.89,30.96 v76.6,31.67 | v77.47,38.18 80.09,38.18 v82.63,40.72 | v89.86,48.34 89.86,51.51 v92.32,53.97
  Bottom 0.203: v66.04,21.67 66.12,21.59 67.87,21.59 75.25,28.97 75.25,30.88 v75.17,30.96 | v76.6,31.67 76.6,37.31 v77.47,38.18 | v82.63,40.72 82.63,41.12 v89.86,48.34 | v92.32,53.97 92.55,53.97 94.3,55.72 95.81,55.72 SV1.9
TDO  (via drill 0.51)
  Top 0.203: v64.22,37.31 64.22,35.8 IC3.83 | v75.73,42.62 77.08,42.62 78.27,41.43 v85.01,41.43
  Bottom 0.203: v64.22,37.31 64.22,37.78 65.65,39.21 72.31,39.21 v75.73,42.62 | v85.01,41.43 87.55,41.43 94.22,48.1 95.81,48.1 SV1.3
TMS  (via drill 0.51)
  Top 0.203: v65.81,17.15 66.2,17.54 66.2,19.92 IC3.47 | v80.97,18.26 82.63,19.92 84.54,19.92 86.05,18.42 86.05,15.72 86.52,15.24 92.95,15.24 100.02,22.3 100.02,48.66 SV1.5
  Bottom 0.203: v65.81,17.15 71.84,17.15 72.55,16.43 79.14,16.43 v80.97,18.26
VCC  (via drill 0.66)
  Top 0.406: IC4.3 91.92,22.15 90.33,22.15 88.82,23.65 87.39,23.65 C6.2 87.32,23.81 87.32,24.21 85.89,25.64 85.89,41.75 85.33,42.31 83.27,42.31 82.95,41.99 78.5,41.99 76.28,44.21 v76.12,44.29 76.12,46.04 IC1.32 | v51.04,51.59 51.04,44.93 48.98,42.86 48.26,42.86 IC2.32 48.1,42.62 47.39,41.91 v47.55,40.64 | v33.18,31.83 16.75,15.4 16.75,14.92 C5.+
  Bottom 0.406: C5.+ 22.94,14.92 27.27,10.6 | 27.27,10.6 27.71,10.16 JP1.+5V1 | JP1.+5V2 30.25,10.16 29.69,10.72 27.39,10.72 27.27,10.6 | 75.89,55.01 76.6,55.01 77.23,54.37 C3.2 77.39,54.45 82.63,49.21 SV1.4 | 75.89,55.01 57.47,55.01 56.84,54.37 54.14,54.37 C4.2 53.9,54.29 51.2,51.59 v51.04,51.59 | v76.12,44.29 76.12,50.4 75.89,50.64 75.89,55.01 | v33.18,31.83 33.58,31.83 36.99,35.24 40.56,35.24 45.96,40.64 v47.55,40.64

## Text on the board
tPlace: Copyright (c) 2014 / Fabio Belavenuto / Licenced under / CERN OHL v1.1 / http://ohwr.org/cernohl